# Altium PCB 矩形板V2.0.pcbdoc (part 2 of 2)
Units mm, origin at the board's own origin, x right, y up, seen from the top; angles counter-clockwise.
Board outline 153.82 x 190.84 mm, 2 copper layers (Top Layer, Bottom Layer); 141 components, 208 nets, 656 pads, 250 vias.
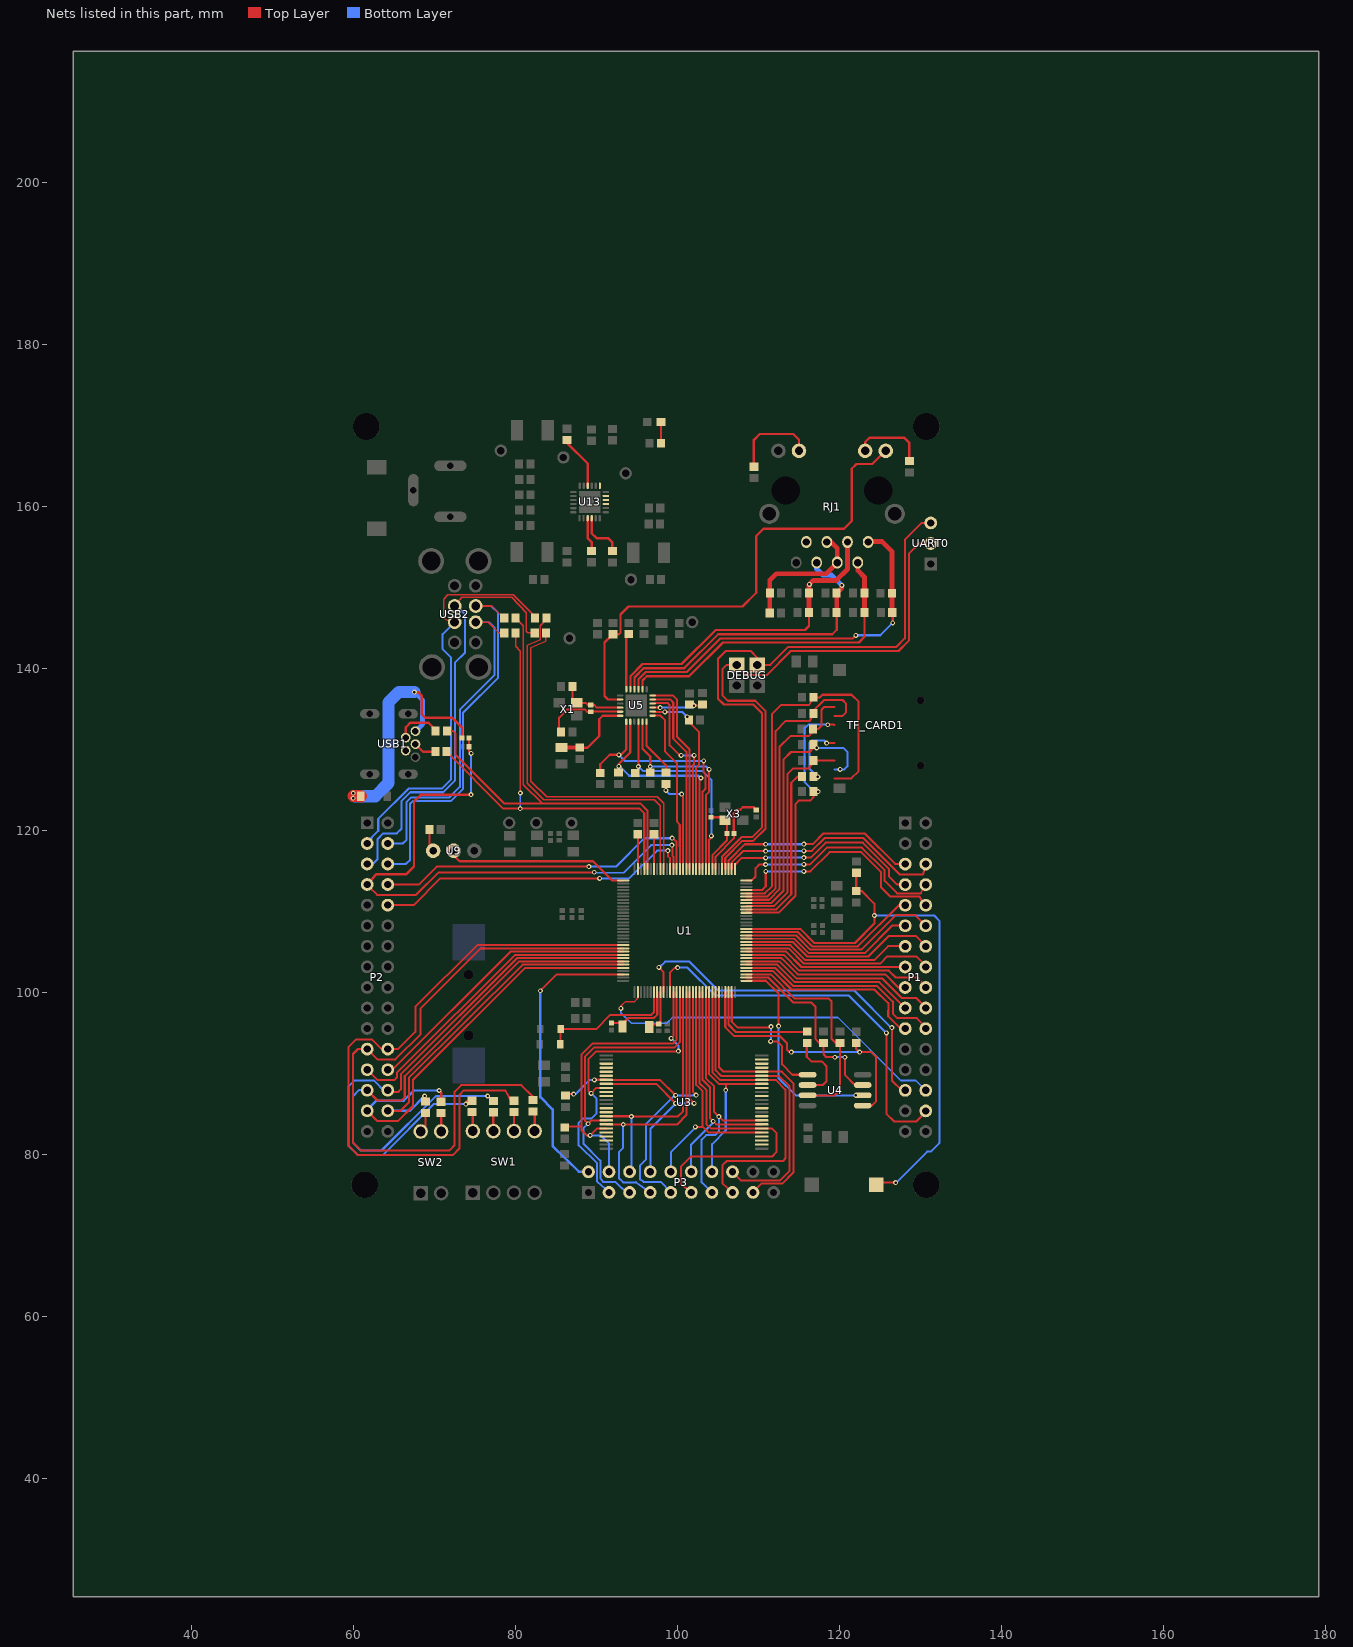
[diagram p2: the nets of this part, all layers, seen from the top]

## Via types
v1: diameter 0.61, hole 0.305, Top Layer to Bottom Layer, 250 vias

## Nets (pads, with @x,y where several pads share a name; then routed paths per layer and width w, separated by ;. In a path a pad name is that pad's centre, name@x,y a point inside that pad or via, vN(x,y) a via of type N, cw(c..) or ccw(c..) an arc to the next point about the centre after c; other vN are vias at no path point) (continued)
PB6: P3.2 U1.30 | length 36.6
  Top Layer w0.254: v1(83.08,100.23) 85.111,102.261 U1.30@93.31,102.26
  Bottom Layer w0.3: v1(83.08,100.23) 83.08,87.092 84.591,85.581 84.595,81.076 87.835,77.87 P3.2@89.02,77.87
PB7: P1.28 U1.34 | length 46.4
  Top Layer w0.2: v1(93.01,98.06) 93.011,98.319 93.58,98.89 94.7,98.89 95.111,99.302 U1.34@95.111,100.059
  Bottom Layer w0.2: v1(93.01,98.06) 93.011,97.519 94.329,96.201 98.67,96.201 99.389,96.919 119.821,96.919 127.588,89.15 129.44,89.15 130.669,87.93 P1.28@130.781,87.93
PB8: P1.27 U1.42 | length 44.5
  Top Layer w0.25: v1(97.71,103.12) 98.309,102.521 U1.42@98.309,100.06 ; v1(126.48,95.68) 126.48,89.15 127.7,87.93 P1.27@128.24,87.93
  Bottom Layer w0.25: v1@97.71,103.112 97.791,103.112 98.49,103.823 101.489,103.823 105.05,100.259 121.84,100.259 126.417,95.682 v1(126.48,95.68)
PB13: P1.10 U1.93 | length 29.3
  Top Layer w0.254: U1.93@108.51,112.661 110.451,112.661 110.91,113.12 v1(110.91,114.96) ; v1@115.63,114.979 116.43,114.979 118.792,117.341 122.721,117.341 125.134,114.913 125.139,113.033 126.298,111.87 129.902,111.87 130.483,110.79 P1.10@130.781,110.79
  Bottom Layer w0.254: v1(110.91,114.96) 110.93,114.98 v1(115.63,114.98)
PC0: P1.30 U1.44 | length 48.6
  Top Layer w0.25: U1.44@99.109,100.059 99.109,102.5 99.671,103.059 v1@100.029,103.079 ; v1(125.8,95.03) 125.8,85.05 126.77,84.08 129.483,84.08 P1.30@130.78,85.39
  Bottom Layer w0.25: v1@100.029,103.079 101.251,103.079 104.69,99.66 121.13,99.66 125.76,95.03 v1(125.8,95.03)
  other v1: 100.03,103.08
PC1: P3.3 U1.45 U3.9 | length 41.5
  Top Layer w0.25: U3.9@91.22,88.23 90.001,88.23 89.356,87.567 89.01,87.872 89.004,91.78 89.922,92.709 100.049,92.709 v1(100.11,92.77) ; v1(99.23,94.35) 99.512,94.633 U1.45@99.512,100.067
  Bottom Layer w0.25: v1@89.356,87.567 90.019,86.899 90.019,85.088 89.412,84.481 88.38,84.481 87.809,83.909 87.801,81.146 90.09,78.913 90.09,76.655 P3.3@91.56,75.33 ; v1(99.23,94.35) 100.11,93.47 v1(100.11,92.77)
  other v1: 89.356,87.567
PC2: P3.4 R29.2 U1.46 U3.19 | length 39.8
  Top Layer w0.25: R29.2@85.965,83.46 88.101,83.46 ; U3.19@91.22,83.23 90.078,83.23 v1(89.219,82.37) 88.8,82.37 88.139,83.031 88.139,92.34 89.511,93.709 99.46,93.709 99.912,94.161 U1.46@99.912,100.066
  Bottom Layer w0.25: v1(89.219,82.37) 90.499,82.37 91.56,81.311 P3.4@91.56,77.87
PC3: P3.5 U1.47 U3.17 | length 41.6
  Top Layer w0.25: U3.17@91.22,84.23 89.39,84.23 v1(88.965,83.805) 88.596,84.174 88.584,92.093 89.739,93.249 99.671,93.249 100.313,93.889 U1.47@100.313,100.066
  Bottom Layer w0.25: v1@88.965,83.805 88.429,83.287 88.429,81.301 90.481,79.249 90.481,77.085 90.865,76.597 92.361,76.599 92.442,76.528 93.13,75.84 93.984,75.329 P3.5@94.1,75.33
PC4: P3.6 U1.48 U3.16 | length 31.4
  Top Layer w0.25: U3.16@91.22,84.73 94.29,84.73 v1(94.32,84.7) ; v1@94.319,84.699 100.049,84.699 100.712,85.362 U1.48@100.712,100.066
  Bottom Layer w0.25: P3.6@94.1,77.87 94.32,78.09 v1(94.32,84.7)
PC5: P3.7 U1.49 U3.18 | length 36.9
  Top Layer w0.25: U3.18@91.22,83.73 93.29,83.73 v1(93.31,83.71) ; v1@93.311,83.709 99.963,83.709 101.129,84.905 U1.49@101.113,100.064
  Bottom Layer w0.25: v1(93.31,83.71) 93.31,80.851 92.77,80.31 92.77,77.11 93.313,76.577 94.878,76.582 P3.7@96.64,75.33
PC6: P3.8 U1.50 U3.8 | length 35.5
  Top Layer w0.25: U3.8@91.22,88.73 97.37,88.73 v1(99.769,86.331) ; U1.50@101.511,100.067 101.511,86.874 v1(102.055,86.331)
  Bottom Layer w0.25: P3.8@96.64,77.87 96.68,77.91 96.68,83.17 99.769,86.259 v1(99.769,86.331) v1(102.055,86.331)
PC7: P3.9 R28.1 U1.51 U3.7 | length 47.3
  Top Layer w0.25: R28.1@86.18,87.285 86.369,87.474 v1(87.196,87.474) ; U3.7@91.22,89.23 97.841,89.23 v1(99.769,87.303) ; U1.51@101.913,100.067 101.913,87.743 v1(102.309,87.347)
  Top Layer w0.3: v1(89.76,89.22) 89.77,89.23 U3.7@91.22,89.23
  Bottom Layer w0.25: v1(87.196,87.474) 87.45,87.474 89.196,89.22 v1(89.76,89.22) ; P3.9@99.18,75.33 97.926,76.62 95.861,76.62 95.401,76.94 95.401,78.659 96.11,79.371 96.11,83.749 99.663,87.303 v1(99.769,87.303) ; v1(99.769,87.303) 102.265,87.303 v1(102.309,87.347)
PC8: P3.10 U1.52 U3.29 | length 32.3
  Top Layer w0.25: v1(102.22,83.42) 103.12,83.42 ; U1.52@102.312,100.066 102.312,88.614 103.12,87.806 103.12,83.419 103.819,82.731 U3.29@110.42,82.73
  Bottom Layer w0.25: P3.10@99.18,77.87 99.18,80.27 102.22,83.309 v1(102.22,83.42)
PC9: P3.11 U1.53 U3.30 | length 44.5
  Top Layer w0.25: P3.11@101.72,75.33 100.43,76.361 100.43,78.52 101.657,79.749 111.677,79.749 112.221,80.29 112.221,82.67 111.66,83.229 110.42,83.229 104.128,83.229 103.58,83.752 103.58,87.981 102.714,88.837 U1.53@102.714,100.066
PC10: P3.12 U1.54 U3.31 | length 30.1
  Top Layer w0.25: U1.54@103.112,100.066 103.112,89.21 104.04,88.281 104.04,84.47 v1(104.4,84.11) 104.78,83.73 U3.31@110.42,83.73
  Bottom Layer w0.25: P3.12@101.72,77.87 101.68,77.91 101.68,81.209 104.4,83.93 v1(104.4,84.11)
PC11: P3.13 U1.55 U3.32 | length 32.9
  Top Layer w0.25: U1.55@103.514,100.066 103.509,89.447 104.53,88.428 104.53,85.26 v1(105.11,84.68) ; v1@105.109,84.679 105.617,84.23 U3.32@110.42,84.23
  Bottom Layer w0.25: P3.13@104.26,75.33 102.99,76.569 102.99,81.85 103.539,82.401 104.639,82.401 105.11,82.872 v1(105.11,84.68)
PC12: P3.14 U1.56 U3.41 | length 28.7
  Top Layer w0.25: U1.56@103.912,100.067 103.912,89.935 105.117,88.73 U3.41@110.42,88.73 ; v1(105.97,87.95) 105.981,87.961 105.981,88.73
  Bottom Layer w0.25: P3.14@104.26,77.87 104.281,81.291 105.97,82.98 v1(105.97,87.95)
PC13: P3.15 U1.57 U3.42 | length 40.3
  Top Layer w0.25: U1.57@104.313,100.067 104.313,90.168 105.251,89.23 U3.42@110.42,89.23 112.14,89.231 113.341,88.027 113.338,79.51 113.039,79.2 106.097,79.2 105.561,78.659 105.561,76.48 P3.15@106.8,75.33
PC14: P3.16 U1.58 U3.43 | length 38.1
  Top Layer w0.25: U1.58@104.712,100.067 104.712,90.405 105.387,89.73 U3.43@110.42,89.73 ; P3.16@106.8,77.87 107.9,76.78 112.66,76.78 113.859,77.979 113.859,88.41 112.541,89.729 U3.43@110.42,89.729
PC15: P3.17 U1.59 U3.44 | length 36.3
  Top Layer w0.25: U1.59@105.114,100.066 105.114,90.808 105.692,90.23 U3.44@110.42,90.23 ; P3.17@109.3,75.329 110.377,76.409 112.94,76.409 114.319,77.788 114.319,88.802 112.889,90.229 U3.44@110.42,90.229
PD8: P1.21 U1.68 | length 23.5
  Top Layer w0.254: U1.68@108.51,102.659 111.812,102.66 114.09,100.379 124.319,100.379 126.041,98.685 126.038,97.082 127.58,95.54 P1.21@128.116,95.54
PD9: P1.22 U1.69 | length 26.3
  Top Layer w0.254: U1.69@108.51,103.06 112.051,103.061 114.271,100.839 124.641,100.839 126.6,98.88 126.6,97.389 127.151,96.841 129.559,96.841 P1.22@130.781,95.55
PD10: P1.19 U1.70 | length 21.9
  Top Layer w0.254: U1.70@108.51,103.459 112.35,103.46 114.509,101.301 124.949,101.301 P1.19@128.13,98.09
PD11: P1.20 U1.71 | length 24.6
  Top Layer w0.254: U1.71@108.51,103.86 112.589,103.861 114.69,101.761 125.269,101.761 127.689,99.332 129.47,99.33 P1.20@130.781,98.09
PD12: P1.17 U1.72 | length 21.2
  Top Layer w0.254: U1.72@108.51,104.259 112.869,104.24 114.85,102.261 125.657,102.261 127.273,100.63 P1.17@128.241,100.63
PD13: P1.18 U1.73 | length 23.9
  Top Layer w0.254: U1.73@108.51,104.66 113.13,104.661 115.071,102.721 126.12,102.721 126.981,101.86 129.701,101.86 P1.18@130.669,100.63
PD14: P1.15 U1.74 | length 20.4
  Top Layer w0.254: U1.74@108.51,105.059 113.43,105.06 115.33,103.16 P1.15@128.13,103.17
PD15: P1.16 U1.75 | length 24
  Top Layer w0.254: U1.75@108.51,105.46 113.75,105.459 115.63,103.579 125.04,103.579 125.932,104.471 129.493,104.471 P1.16@130.781,103.17
PE10: P2.8 U1.115 | length 41.6
  Top Layer w0.254: P2.8@64.23,113.34 68.05,113.34 70.26,115.55 v1@89.071,115.55 ; v1(99.35,119.08) v1(99.35,119.08) 99.91,118.62 U1.115@99.909,115.259
  Bottom Layer w0.254: v1(89.07,115.56) 92.416,115.56 95.896,119.061 v1@99.351,119.061
PE11: P2.7 R68.1 R69.2 U1.116 | length 73.1
  Top Layer w0.24: P2.7@61.69,113.34 61.84,113.13 62.909,112.06 67.72,112.06 70.509,114.849 v1@89.729,114.849 ; R69.2@74.244,130.35 74.244,129.826 v1(74.52,129.55)
  Top Layer w0.254: R69.2@74.244,130.35 74.254,130.36 R68.1@74.254,131.43 ; v1(99.31,118.22) 99.371,118.22 99.371,116.909 99.511,116.757 U1.116@99.51,115.259
  Top Layer w0.3: P2.7@61.69,113.34 62.838,114.631 66.547,114.631 67.471,115.571 67.471,123.589 68.322,124.44 v1(74.51,124.44)
  Bottom Layer w0.24: v1(89.73,114.86) 89.79,114.8 93.35,114.8 96.51,117.96 96.75,118.22 v1(99.31,118.22)
  Bottom Layer w0.3: v1(74.51,124.44) 74.51,129.54 v1(74.52,129.55)
PE12: P2.10 U1.117 | length 39.8
  Top Layer w0.254: P2.10@64.23,110.8 67.42,110.8 70.72,114.1 v1@90.39,114.1 ; v1@98.83,117.539 98.83,116.861 99.109,116.582 U1.117@99.109,115.259
  Bottom Layer w0.254: v1@90.39,114.1 94.034,114.1 97.494,117.539 v1@98.83,117.539
  other v1: 90.39,114.1 98.83,117.54
PF7: P1.8 U1.96 | length 28.2
  Top Layer w0.254: U1.96@108.51,113.86 109.17,113.861 109.65,114.339 109.65,115.36 110.11,115.82 v1(110.89,115.82) ; v1@115.609,115.84 116.389,115.84 118.459,117.91 122.78,117.91 125.591,115.098 125.589,113.8 127.141,112.251 130.049,112.251 130.542,113.33 P1.8@130.669,113.33
  Bottom Layer w0.254: v1(110.89,115.82) 115.59,115.82 v1(115.61,115.84)
PF8: P1.7 U1.97 | length 25.4
  Top Layer w0.254: U1.97@107.11,115.259 107.11,115.799 107.949,116.64 v1(110.89,116.64) ; v1@115.609,116.66 116.45,116.66 118.299,118.509 122.899,118.509 126.12,115.278 126.12,114.359 127.156,113.323 P1.7@128.139,113.33
  Bottom Layer w0.254: v1(110.89,116.64) 110.91,116.66 v1(115.61,116.66)
PF9: P1.6 U1.98 | length 28.9
  Top Layer w0.254: U1.98@106.709,115.259 106.709,116.079 108.111,117.481 v1(110.89,117.48) ; v1@115.609,117.501 116.59,117.501 118.18,119.091 122.945,119.091 127.461,114.58 130.334,114.58 P1.6@130.722,115.908
  Bottom Layer w0.254: v1(110.89,117.48) 115.59,117.48 v1(115.61,117.5)
PF10: P1.5 U1.99 | length 25.8
  Top Layer w0.254: U1.99@106.31,115.259 106.31,116.3 108.33,118.319 v1@110.89,118.319 ; v1@115.609,118.339 116.709,118.339 118.04,119.67 123.11,119.67 126.879,115.901 P1.5@128.129,115.901
  Bottom Layer w0.254: v1(110.89,118.32) 115.59,118.32 v1(115.61,118.34)
PG0: P2.29 R18.1 U1.28 | length 53.7
  Top Layer w0.254: P2.29@61.69,85.4 62.96,84.13 65.48,84.13 67.349,86 67.349,89.221 81.205,103.061 U1.28@93.31,103.06
  Top Layer w0.3: v1(70.57,87.91) 70.82,87.66 R18.1@70.82,86.52
  Bottom Layer w0.3: P2.29@61.36,85.19 62.841,86.67 66.201,86.67 67.453,87.923 v1(70.57,87.91)
PG1: P2.30 R19.1 U1.27 | length 44.4
  Top Layer w0.254: P2.30@64.23,85.4 65.8,85.4 66.831,86.429 66.831,89.462 80.882,103.46 U1.27@93.31,103.459
  Top Layer w0.3: v1(68.78,87.23) 68.78,86.64 R19.1@68.89,86.53
  Bottom Layer w0.3: P2.30@64.23,85.4 66.95,85.4 v1(68.78,87.23)
PG3: P2.27 R61.1 U1.26 | length 69.4
  Top Layer w0.254: P2.27@61.69,87.94 62.96,86.67 65.899,86.67 66.331,87.097 66.328,89.688 80.484,103.861 U1.26@93.31,103.86 ; v1(76.57,87.23) 77.17,86.63 R61.1@77.27,86.63
  Bottom Layer w0.25: P2.27@61.69,87.951 60.669,87.951 59.94,87.219 59.94,81.443 60.908,80.501 63.46,80.501 70.169,87.209 v1@76.569,87.209
PG5: P2.28 R60.1 U1.25 | length 68.8
  Top Layer w0.254: P2.28@63.9,87.73 65.531,87.73 65.861,88.06 65.861,89.899 80.194,104.26 U1.25@93.31,104.259 ; v1(73.88,86.24) 73.88,86.46 74.07,86.65 R60.1@74.66,86.65
  Bottom Layer w0.25: P2.28@63.9,87.73 63.941,87.73 62.5,89.17 60.138,89.17 59.371,88.398 59.371,81.093 60.504,79.97 63.661,79.97 69.93,86.239 v1@73.88,86.239
PG6: P2.25 U1.24 | length 38.9
  Top Layer w0.254: P2.25@61.69,90.48 62.98,89.19 65.023,89.19 65.401,89.574 65.401,90.143 79.988,104.661 U1.24@93.31,104.66
PG7: P2.26 U1.23 | length 35.1
  Top Layer w0.254: P2.26@64.23,90.48 64.809,90.48 79.391,105.06 U1.23@93.31,105.059
PG8: P2.23 R62.1 U1.22 | length 83.5
  Top Layer w0.254: P2.23@61.69,93.02 62.95,91.761 65.17,91.761 68.289,94.877 68.289,98.062 75.726,105.461 U1.22@93.31,105.46 ; P2.23@61.69,93.041 60.56,93.041 59.94,92.418 59.94,81.469 60.951,80.483 71.809,80.491 72.49,81.179 72.495,87.765 73.311,88.581 80.72,88.581 82.17,87.13 R62.1@82.17,86.729
PG9: P2.24 R63.1 U1.21 | length 83.2
  Top Layer w0.25: P2.24@64.23,93.01 63.499,93.01 62.279,94.23 60.324,94.23 59.399,93.31 59.399,81.07 60.522,79.95 72.3,79.95 73.087,80.762 73.097,87.397 73.631,87.93 78.741,87.93 79.46,86.65 R63.1@79.83,86.65
  Top Layer w0.254: P2.24@64.23,93.02 65.487,93.02 67.644,95.164 67.636,98.23 75.299,105.86 U1.21@93.57,105.86
PG11: P1.13 U1.76 | length 21.1
  Top Layer w0.254: U1.76@108.51,105.859 113.951,105.86 115.79,104.019 124.294,104.019 126.015,105.74 P1.13@128.13,105.74
PG12: P1.14 U1.77 | length 24.5
  Top Layer w0.254: U1.77@108.51,106.26 114.21,106.261 116.011,104.461 123.59,104.461 126.13,107.001 129.409,107.001 P1.14@130.669,105.741
PG13: P1.11 U1.78 | length 21.8
  Top Layer w0.254: U1.78@108.51,106.659 114.451,106.64 116.209,104.88 123.14,104.88 126.539,108.281 P1.11@128.129,108.281
PG14: P1.12 U1.79 | length 25.2
  Top Layer w0.254: U1.79@108.51,107.06 114.649,107.059 116.409,105.299 122.681,105.299 126.963,109.561 129.389,109.561 P1.12@130.669,108.281
PG15: P1.9 U1.80 | length 22.5
  Top Layer w0.254: U1.80@108.51,107.459 114.89,107.46 116.628,105.7 122.279,105.7 127.4,110.821 P1.9@128.129,110.821
R9_2: LED4.1 R9.2 | length 2.6
  Top Layer w0.28: R9.2@97.966,167.842 97.966,170.431 LED4.1@97.977,170.442
R11_2: R11.2 U13.10 | length 6
  Top Layer w0.3: U13.10@89.414,158.59 89.414,156.724 90.016,156.122 91.436,156.122 91.967,155.594 R11.2@91.967,154.522
R60_2: R60.2 SW1.8 | length 2.4
  Top Layer w0.3: R60.2@74.66,85.25 74.74,85.17 SW1.8@74.74,82.9
R61_2: R61.2 SW1.7 | length 2.3
  Top Layer w0.3: R61.2@77.27,85.23 77.27,82.91 SW1.7@77.28,82.9
R62_2: R62.2 SW1.5 | length 2.5
  Top Layer w0.3: R62.2@82.17,85.33 82.36,85.14 SW1.5@82.36,82.9
R63_2: R63.2 SW1.6 | length 2.4
  Top Layer w0.3: SW1.6@79.82,82.9 79.82,85.24 R63.2@79.83,85.25
R73_2: R73.2 U13.9 | length 4.3
  Top Layer w0.3: U13.9@88.916,158.59 88.916,156.122 89.406,155.632 R73.2@89.406,154.542
R74_1: R74.1 U13.22 | length 6.7
  Top Layer w0.28: R74.1@86.376,168.232 86.376,167.882 88.931,165.327 U13.22@88.931,162.59
RESET: C50.2 R64.1 SW3.2 U1.81 | length 70.8
  Top Layer w0.254: U1.81@108.51,107.86 115.16,107.862 116.889,106.129 121.931,106.129 124.33,108.528 v1(124.33,109.52) 124.33,110.99 122.772,112.548 R64.1@122.086,112.549 ; SW3.2@124.58,76.27 124.85,76.54 v1(126.94,76.54)
  Top Layer w0.3: R64.1@122.086,112.549 122.086,114.749 C50.2@122.136,114.799
  Bottom Layer w0.25: v1(124.33,109.52) 126.57,109.52 131.71,109.52 132.36,108.87 132.36,81.41 132.33,81.41 131.29,80.37 130.84,80.37 127.01,76.54 v1(126.94,76.54)
RJ1_4: C42.1 R17.1 RJ1.4 RJ1.5 | length 16.6
  Top Layer w0.6: C42.1@111.411,149.327 111.411,150.938 112.206,151.73 118.365,151.73 RJ1.4@119.734,153.104 ; R17.1@111.412,146.914 C42.1@111.412,149.327 ; RJ1.5@118.464,155.685 118.937,155.68 119.732,154.89 RJ1.4@119.734,153.145
RJ1_7: RJ1.7
RJ1_10: R46.2 RJ1.10 | length 9.2
  Top Layer w0.3: RJ1.10@123.185,166.935 123.181,167.961 123.75,168.53 127.989,168.53 128.639,167.879 R46.2@128.639,165.629
RJ1_11: R47.2 RJ1.11 | length 10.8
  Top Layer w0.3: R47.2@109.44,164.941 109.44,168.25 110.169,168.979 114.309,168.979 115.012,168.276 RJ1.11@115.015,166.934
RMIIOREFCLK: C23.2 U1.109 U5.14 | length 23.4
  Top Layer w0.254: U5.14@97.075,134.679 97.094,134.66 v1(98.45,134.66) ; C23.2@101.185,133.437 101.413,133.437 102.65,132.2 102.65,128.1 102.31,127.76 U1.109@102.309,115.259
  Bottom Layer w0.254: v1(98.45,134.66) 100.57,134.66 v1(101.19,134.04)
RMIOCRSDV: R36.2 U1.106 U5.11 | length 26.7
  Top Layer w0.254: U1.106@103.511,115.259 103.51,124.38 103.91,124.78 v1(103.91,127.56)
  Top Layer w0.28: U5.11@95.685,133.549 95.685,130.125 96.651,129.16 v1(96.651,127.92) R36.2@96.65,127.16
  Bottom Layer w0.254: v1(96.651,127.92) 103.55,127.92 v1(103.91,127.56)
RMIOMDC: U1.114 U5.13 | length 21
  Top Layer w0.254: U5.13@96.836,134.199 97.91,134.199 98.49,133.62 98.49,129.759 99.927,128.321 99.927,121.146 100.29,120.699 U1.114@100.31,115.259
RMIOMDIO: R43.1 U1.113 | length 12.3
  Top Layer w0.254: v1(98.57,124.96) R43.1@98.57,125.76 ; v1(100.53,124.5) 100.709,124.32 U1.113@100.709,115.259
  Bottom Layer w0.254: v1(98.57,124.96) 98.57,124.94 98.99,124.52 100.51,124.52 v1(100.53,124.5)
RMIORXD0: R34.2 U1.108 U5.8 | length 29
  Top Layer w0.254: U1.108@102.711,115.259 102.711,126.284 v1@102.889,126.5
  Top Layer w0.28: R34.2@92.729,127.161 92.77,127.199 v1(92.77,127.94) 92.77,128.227 94.182,129.637 U5.8@94.187,133.549
  Bottom Layer w0.254: v1(92.77,127.94) 92.871,127.94 94.029,126.78 102.609,126.78 v1@102.889,126.5
  other v1: 102.89,126.5
RMIORXD1: R35.2 U1.107 U5.7 | length 32.9
  Top Layer w0.254: U1.107@103.11,115.259 103.11,124.819 103.471,125.182 103.471,126.965 103.25,127.216 v1@103.25,128.621
  Top Layer w0.28: R35.2@90.47,127.14 90.47,127.96 90.47,128.212 91.641,129.384 93.038,129.384 93.673,130.019 93.686,130.031 U5.7@93.686,133.549
  Bottom Layer w0.254: v1@92.77,129.36 93.529,128.601 v1@103.25,128.621
  other v1: 103.25,128.62 92.77,129.36
RMIORXER: R37.2 U1.105 U5.10 | length 27.4
  Top Layer w0.254: U1.105@103.91,115.259 103.91,118.88 104.189,119.16 v1@104.189,119.36
  Top Layer w0.28: R37.2@94.79,127.14 95.186,127.536 v1(95.186,127.92) U5.10@95.186,133.549
  Bottom Layer w0.254: v1@95.185,127.92 95.769,127.341 103.11,127.341 104.189,126.261 v1@104.189,119.36
  other v1: 104.19,119.36
RMIOTXD0: U1.112 U5.17 | length 23.9
  Top Layer w0.254: U5.17@96.93,136.201 99.108,136.201 99.49,135.819 99.49,131.359 101.111,129.739 U1.112@101.111,115.259
RMIOTXD1: U1.111 U5.18 | length 24.8
  Top Layer w0.254: U5.18@96.93,136.702 99.428,136.702 99.97,136.16 99.97,131.56 101.51,130.021 U1.111@101.509,115.259
RMIOTXEN: U1.110 U5.16 | length 24.9
  Top Layer w0.254: U5.16@96.836,135.698 97.33,135.74 98.83,135.74 99.051,135.52 99.051,130.539 100.29,129.299 v1(100.45,129.3) ; U1.110@101.911,115.259 101.911,128.067 102.07,128.226 v1(102.07,129.3)
  Bottom Layer w0.254: v1(100.45,129.3) v1(102.07,129.3)
RTCVD: D4.2 D5.2 U1.39 | length 16.8
  Top Layer w0.25: D5.2@85.54,93.62 85.54,95.44 D4.2@85.6,95.5 ; D4.2@85.599,95.5 89.97,95.5 91.731,97.26 96.788,97.26 97.113,97.582 U1.39@97.113,100.066
RXD0: DEBUG.c U1.100 UART0.2 | length 71.2
  Top Layer w0.254: U1.100@105.911,115.258 105.911,116.622 108.02,118.73 109.361,118.73 110.9,120.27 110.9,134.76 109.62,136.04 106.239,136.04 105.561,136.719 105.561,139.939 106.089,140.47 DEBUG.c@107.33,140.47 107.359,140.47 108.629,139.2 111.035,139.2 113.989,142.18 127.301,142.18 128.578,143.457 128.586,154.217 129.831,155.459 UART0.2@131.278,155.459
RXN: C38.1 R40.1 RJ1.6 U5.22 | length 39.4
  Top Layer w0.28: U5.22@94.701,137.46 94.702,138.921 95.851,140.069 100.839,140.069 105.03,144.26 119.119,144.26 119.671,144.811 R40.1@119.67,146.914
  Top Layer w0.6: R40.1@119.67,146.914 C38.1@119.67,149.327 120.3,149.957 v1(120.3,150.28)
  Bottom Layer w0.6: RJ1.6@117.195,153.145 117.195,152.312 117.941,151.566 119.014,151.566 v1(120.3,150.28)
RXP: C37.1 R38.1 RJ1.3 U5.23 | length 40.3
  Top Layer w0.28: U5.23@94.2,137.46 94.2,139.071 95.701,140.569 100.519,140.569 104.72,144.77 115.749,144.77 116.242,145.261 R38.1@116.241,146.914
  Top Layer w0.6: R38.1@116.241,146.914 C37.1@116.241,149.327 116.241,150.366 v1(116.291,150.416) ; v1@116.29,150.417 116.785,150.91 119.63,150.91 121.004,152.284 RJ1.3@121.004,155.685
S$19: 
S$28: 
S$30: 
S$42: 
S$44: 
S$47: 
S$48: 
S$49: 
S$50: 
S$53: 
S$54: 
S$55: 
S$57: 
S$61: 
S$67: 
S$69: 
S$71: 
S$73: 
S$77: 
S$79: 
S$81: 
S$2331: 
SD_CD: R24.1 TF_CARD1.9 U1.92 | length 48.9
  Top Layer w0.25: U1.92@108.512,112.266 110.804,112.266 111.69,113.153 111.69,134.422 112.813,135.54 116.272,135.54 R24.1@116.79,136.47 117.611,136.47 117.921,136.78 121.499,136.78 122.391,135.891 122.391,127.349 121.489,126.449 119.389,126.449
SD_CLK: R15.1 U1.87 | length 21.8
  Top Layer w0.25: U1.87@108.512,110.267 112.206,110.267 114.06,112.121 114.06,125.907 114.842,126.69 R15.1@115.39,126.69
SD_CLK-P: R15.2 TF_CARD1.5 | length 8
  Top Layer w0.25: v1(118.43,130.81) 119.35,130.81 119.39,130.85
  Bottom Layer w0.25: v1@117.359,126.65 117.319,126.65 116.31,127.661 116.31,130.859 116.579,131.131 118.111,131.131 v1@118.429,130.811
  other v1: 117.36,126.65
SD_CMD: R72.1 TF_CARD1.3 U1.86 | length 34.2
  Top Layer w0.25: U1.86@108.512,109.866 112.505,109.866 114.583,111.943 114.591,123.31 114.979,123.701 116.389,123.699 116.79,124.1 R72.1@116.79,124.829 ; v1(118.57,133.08) 119.36,133.08 119.39,133.05
  Bottom Layer w0.25: v1(117.37,124.82) 116.9,124.82 115.69,126.03 115.69,132.61 116.16,133.08 v1(118.57,133.08)
SD_D0: R71.1 TF_CARD1.7 U1.88 | length 27.2
  Top Layer w0.25: U1.88@108.512,110.666 111.903,110.666 113.57,112.332 113.57,126.978 114.281,127.691 116.254,127.689 116.889,128.649 R71.1@116.79,128.649 ; R71.1@116.79,128.65 119.39,128.65
SD_D1: R70.1 TF_CARD1.8 U1.89 | length 34.3
  Top Layer w0.25: U1.89@108.512,111.067 111.606,111.067 113.079,112.543 113.079,128.771 114.029,129.716 116.31,129.711 116.79,130.201 R70.1@116.79,130.63 v1(117.2,130.22)
  Bottom Layer w0.25: v1@117.199,130.219 120.491,130.219 120.986,129.723 120.994,127.935 120.618,127.559 v1(120.09,127.56) ; 119.389,127.549 119.389,127.56 v1(120.09,127.56)
SD_D2: R26.1 TF_CARD1.1 U1.90 | length 32.9
  Top Layer w0.25: U1.90@108.512,111.466 111.317,111.466 112.599,112.749 112.599,130.328 113.94,131.669 116.219,131.669 117.121,132.571 116.75,132.571 117.42,132.571 117.799,132.949 117.799,134.941 118.101,135.24 119.389,135.24
SD_D3: R25.1 TF_CARD1.2 U1.91 | length 37.6
  Top Layer w0.25: U1.91@108.512,111.867 111.083,111.867 112.119,112.906 112.119,132.299 113.331,133.511 116.305,133.511 116.867,134.489 116.79,134.489 116.468,134.489 118.109,136.129 120.387,136.129 120.811,135.715 120.811,134.58 120.379,134.151 119.389,134.151
SPEED_LED: R48.2 RJ1.9 U5.2 | length 62.4
  Top Layer w0.28: R48.2@92.035,144.251 91.006,143.222 91.006,142.846 91.006,136.623 91.437,136.191 U5.2@92.93,136.191 ; R48.2@92.035,144.251 92.772,144.252 92.97,144.45 92.97,146.681 93.968,147.679 108.04,147.679 109.739,149.378 109.739,156.383 110.631,157.29 120.57,157.29 121.53,158.25 121.53,164.679 122.119,165.271 124.047,165.271 RJ1.9@125.726,166.934
SPI_CLK: R16.2 U1.62 | length 14
  Top Layer w0.254: U1.62@106.31,100.06 106.31,96.06 107.23,95.14 R16.2@115.97,95.14
SPI_CS: R30.1 U1.61 U4.1 | length 33.6
  Top Layer w0.254: U1.61@105.911,100.06 105.911,95.738 107.029,94.621 112.67,94.621 113.529,93.76 113.529,92.919 113.801,92.65 v1(114.07,92.65) ; R30.1@122.089,93.76 122.089,93.041 v1(122.49,92.64) ; v1(122.49,92.64) 123.945,92.639 124.499,92.081 124.499,86.541 124.004,86.046 U4.1@122.879,86.046
  Bottom Layer w0.254: v1(114.07,92.65) 114.08,92.64 v1(122.49,92.64)
SPI_D3: R31.1 U1.67 U4.7 | length 27.9
  Top Layer w0.254: U1.67@108.51,102.26 111.51,102.261 114.509,99.259 118.69,99.259 119.031,98.921 119.031,94.28 119.531,93.78 120.069,93.78 120.07,87.98 119.405,87.315 U4.7@116.08,87.315
SPI_DI: U1.65 U4.2 | length 26.4
  Top Layer w0.254: U1.65@108.51,101.46 110.931,101.461 112.49,99.902 v1(112.49,95.85) ; v1(122.04,87.3) 122.865,87.3 U4.2@122.88,87.315
  Bottom Layer w0.254: v1(112.49,95.85) 112.49,89.439 114.629,87.3 v1(122.04,87.3)
SPI_DO: U1.63 U4.5 | length 18.4
  Top Layer w0.254: U1.63@106.709,100.06 106.709,96.421 107.46,95.67 111.56,95.67 v1(111.56,95.81) ; v1(111.51,93.97) 112.32,93.97 112.93,93.36 112.93,91.13 114.205,89.855 U4.5@116.08,89.855
  Bottom Layer w0.254: v1(111.51,93.97) 111.56,94.02 v1(111.56,95.81)
SPI_WP: R32.1 U1.66 U4.3 | length 24.3
  Top Layer w0.254: U1.66@108.51,101.861 111.228,101.862 114.309,98.779 116.529,98.779 117.029,98.281 117.029,94.28 117.529,93.78 R32.1@118.03,93.78 118.05,92.46 118.35,92.02 v1@119.45,92.02 ; v1(120.67,92.02) 120.67,89.84 121.925,88.585 U4.3@122.88,88.585
  Bottom Layer w0.254: v1@119.45,92.02 v1(120.67,92.02)
  other v1: 119.45,92.02
SW2_3: R18.2 SW2.3 | length 2.3
  Top Layer w0.3: R18.2@70.82,85.12 70.82,82.86 SW2.3@70.83,82.85
SW2_4: R19.2 SW2.4 | length 2.5
  Top Layer w0.3: SW2.4@68.29,82.85 68.89,83.45 R19.2@68.89,85.13
TXD0: DEBUG.a U1.101 UART0.3 | length 75.4
  Top Layer w0.254: U1.101@105.51,115.258 105.51,116.78 107.921,119.19 109.231,119.19 110.461,120.419 110.461,134.468 109.361,135.571 105.749,135.571 105.01,136.31 105.01,141.209 106,142.2 109.03,142.2 109.871,141.329 DEBUG.a@109.87,140.47 111.469,140.47 113.699,142.7 127.052,142.7 128.088,143.737 128.098,155.929 130.171,157.999 UART0.3@131.278,157.999
TXN: C36.1 R42.1 RJ1.2 U5.20 | length 40.3
  Top Layer w0.28: U5.20@95.7,137.46 95.701,138.54 96.209,139.05 101.436,139.05 105.635,143.239 122.419,143.239 123.1,143.958 R42.1@123.099,146.914
  Top Layer w0.6: RJ1.2@122.275,153.145 122.274,152.144 123.092,151.326 C36.1@123.099,149.327 ; R42.1@123.099,146.914 C36.1@123.099,149.327
TXP: C35.1 R41.1 RJ1.1 U5.21 | length 47.8
  Top Layer w0.28: U5.21@95.198,137.46 95.198,138.7 96.079,139.579 101.169,139.579 105.299,143.729 121.659,143.729 v1(122.051,144.12)
  Top Layer w0.3: R41.1@126.528,146.914 126.591,146.851 v1(126.591,145.666)
  Top Layer w0.6: RJ1.1@123.544,155.685 125.284,155.685 126.491,154.478 C35.1@126.491,149.314 ; C35.1@126.491,149.316 126.491,146.951 R41.1@126.528,146.914
  Bottom Layer w0.28: v1(122.051,144.12) 125.045,144.12 v1(126.591,145.666)
U3_3: U3.3
U3_4: U3.4
U3_5: U3.5
U3_6: U3.6
U3_10: U3.10
U3_11: U3.11
U3_14: U3.14
U3_15: U3.15
U3_20: U3.20
U3_21: U3.21
U3_22: U3.22
U3_26: U3.26
U3_27: U3.27
U3_28: U3.28
U3_33: U3.33
U3_35: U3.35
U3_38: U3.38
U3_40: U3.40
U3_45: U3.45
U3_46: U3.46
U3_47: U3.47
U4_6: R16.1 U4.6 | length 9
  Top Layer w0.254: R16.1@115.97,93.739 115.97,92.071 116.541,91.499 117.811,91.499 118.41,90.9 118.41,89.07 117.925,88.585 U4.6@116.08,88.585
U5_6: C33.1 C34.1 U5.6 | length 10.1
  Top Layer w0.28: C34.1@87.936,130.249 88.885,130.25 90.335,131.698 90.335,133.75 90.778,134.192 U5.6@92.93,134.192
  Top Layer w0.5: C33.1@85.686,130.265 87.92,130.265 C34.1@87.936,130.249
U5_12: R43.2 U5.12 | length 7.4
  Top Layer w0.254: U5.12@96.186,133.549 96.186,130.484 97.51,129.16 98.39,128.28 98.57,128.1 R43.2@98.57,127.16
U5_15: C43.2 R14.1 U5.15 | length 7.3
  Top Layer w0.254: U5.15@96.836,135.198 96.837,135.2 v1(97.87,135.2)
  Top Layer w0.28: R14.1@101.136,135.449 v1(102.05,135.449) 102.948,135.449 C43.2@103.086,135.31
  Bottom Layer w0.254: v1(97.87,135.2) 101.801,135.2 v1(102.05,135.449)
U5_24: R49.2 U5.24 | length 7
  Top Layer w0.28: U5.24@93.686,137.349 93.686,143.945 93.99,144.248 R49.2@93.99,144.26
U9_3: R20.1 U9.3 | length 2.8
  Top Layer w0.254: R20.1@69.38,120.16 69.38,117.98 U9.3@69.84,117.52
U13_15: U13.15
U13_16: U13.16
U13_17: U13.17
U13_19: U13.19
USB0_DM: R12.2 R53.2 U1.124 | length 63.6
  Top Layer w0.18: R53.2@80.02,146.26 80.989,145.29 80.989,125.695 83.331,123.361 81.555,123.361
  Top Layer w0.254: R12.2@71.55,132.279 72.31,132.279 72.61,131.979 72.61,129.34 78.589,123.361 95.429,123.361 96.31,122.479 U1.124@96.31,115.259
USB0_DM_E: P2.6 R53.1 USB2.2 | length 48
  Top Layer w0.2: USB2.2@75.094,147.74 77.039,147.74 78.52,146.259 R53.1@78.619,146.259
  Bottom Layer w0.25: P2.6@64.23,115.88 66.468,115.88 66.971,116.333 66.971,123.29 67.359,123.681 72.071,123.681 73.549,125.159 73.549,134.59 77.86,138.9 77.86,146.889 77.009,147.74 USB2.2@75.094,147.74
USB0_DP: R13.2 R54.2 U1.125 | length 57.2
  Top Layer w0.18: R54.2@80.02,144.4 80.02,142.767 80.611,142.177 v1@80.611,124.649
  Top Layer w0.25: v1(80.59,122.72) 81.262,122.72
  Top Layer w0.254: R13.2@71.436,129.749 71.436,129.795 78.51,122.721 95.33,122.721 95.909,122.139 U1.125@95.909,115.259
  Bottom Layer w0.18: v1(80.59,122.72) 80.59,124.63 v1(80.61,124.65)
USB0_DP_E: P2.4 R54.1 USB2.3 | length 42.6
  Top Layer w0.2: USB2.3@75.094,145.748 76.63,145.748 77.979,144.4 R54.1@78.619,144.4
  Bottom Layer w0.25: P2.4@64.23,118.42 66.112,118.42 66.569,118.87 66.569,123.559 67.09,124.08 71.799,124.08 73.13,125.411 73.13,134.951 77.42,139.241 77.42,145.05 76.74,145.731 USB2.3@75.094,145.751
USB0_ID: U1.1 U9.2 | length 22.8
  Top Layer w0.26: U9.2@72.38,117.52 72.38,116.931 73.09,116.221 89.569,116.221 91.929,113.861 U1.1@93.31,113.86
USB0_REXT: R51.2 U1.127 | length 4.3
  Top Layer w0.254: R51.2@95.109,119.554 U1.127@95.111,115.259
USB1_1: D6.1 R68.2 USB1.1 | length 35.4
  Top Layer w0.3: v1@67.519,137.11 67.987,137.11 68.421,136.681 68.421,134.42 68.909,133.93 72.211,133.93 73.405,132.733 R68.2@73.405,131.43
  Top Layer w1.5: v1@60.019,124.26 D6.1@60.904,124.24
  Bottom Layer w0.6: v1@67.519,137.11 68.54,136.091 68.54,133.135 USB1.1@67.657,132.279
  Bottom Layer w1.5: v1@60.131,124.24 62.681,124.24 64.324,125.883 64.309,135.819 65.599,137.11 v1@67.519,137.11
  other v1: 59.96,124 59.97,124.63 67.52,137.11
USB1_2: R12.1 USB1.2 | length 5.9
  Top Layer w0.3: USB1.2@66.455,131.486 66.455,132.756 67.049,133.348 69.236,133.348 70.136,132.449 R12.1@70.136,132.098
USB1_3: R13.1 USB1.3 | length 2.8
  Top Layer w0.3: USB1.3@67.651,130.679 68.591,129.749 R13.1@70.037,129.749
USB1_4: USB1.4
USB1_DM: R58.2 U1.119 | length 45.2
  Top Layer w0.18: R58.2@83.78,144.42 83.773,143.379 81.881,142.573 81.881,126.124 83.839,124.194 97.509,124.194 98.309,123.381 U1.119@98.309,115.259
USB1_DM_E: P2.5 R58.1 USB2.6 | length 55.4
  Top Layer w0.18: USB2.6@72.493,147.74 72.571,147.741 73.385,148.84 79.52,148.84 81.35,146.935 81.35,144.608 81.538,144.42 R58.1@82.38,144.42
  Bottom Layer w0.25: P2.5@61.36,115.67 62.16,115.67 62.97,116.48 62.97,118.949 63.679,119.66 65.36,119.66 65.906,120.206 65.914,123.633 67.019,124.74 71.068,124.74 72.51,126.178 72.51,140.729 73.77,141.989 73.77,146.726 72.798,147.74 USB2.6@72.493,147.74
USB1_DP: R59.2 U1.120 | length 47.2
  Top Layer w0.18: R59.2@83.829,146.259 83.829,146.03 83.079,145.281 83.079,143.592 81.449,142.906 81.449,125.87 83.499,123.821 97.151,123.821 97.91,123.059 U1.120@97.91,115.259
USB1_DP_E: P2.3 R59.1 USB2.7 | length 51.8
  Top Layer w0.18: USB2.7@72.493,145.739 71.994,145.739 71.121,146.235 71.121,148.581 71.67,149.13 79.72,149.13 82.43,146.42 R59.1@82.43,146.26
  Bottom Layer w0.25: P2.3@61.69,118.42 61.842,118.42 62.279,119.19 63.059,119.967 63.059,121.461 66.79,125.19 70.877,125.19 72.061,126.368 72.061,141.359 71.009,142.408 71.009,144.26 USB2.7@72.493,145.738
USB1_REXT: R52.2 U1.122 | length 4.3
  Top Layer w0.254: U1.122@97.11,115.259 R52.2@97.11,119.554
X2_IN: C47.2 U1.40 X2.1 | length 10.7
  Top Layer w0.25: C47.2@91.87,96.224 93.483,96.223 93.064,95.804 93.222,95.804 92.904,95.804 93.961,96.861 97.1,96.861 97.512,97.272 U1.40@97.512,100.066
X2_OUT: C48.2 U1.41 X2.2 | length 5.5
  Top Layer w0.25: X2.2@96.518,95.756 96.519,96.089 97.489,96.089 97.913,96.513 U1.41@97.913,100.066
X_IN: C49.2 R55.1 U1.103 X3.1 | length 11
  Top Layer w0.254: U1.103@104.713,115.266 104.713,116.782 106.971,119.038 R55.1@106.969,119.638
  Top Layer w0.28: R55.1@106.968,119.637 106.968,122.139 107.41,122.578 107.771,122.578 X3.1@108.07,122.88 ; X3.1@108.07,122.88 109.414,122.88 C49.2@109.75,122.544
X_OUT: C46.2 R55.2 U1.104 X3.3 | length 8.7
  Top Layer w0.254: U1.104@104.313,115.266 104.313,116.976 106.136,118.849 R55.2@106.121,119.638
  Top Layer w0.28: C46.2@104.15,121.656 105.494,121.656 X3.3@105.87,121.28 106.121,121.029 R55.2@106.121,119.638
XTAL1: C41.2 R50.1 U5.5 X1.1 | length 9.8
  Top Layer w0.24: 85.386,133.947 86.417,134.979 88.556,134.979 88.86,134.674 R50.1@89.285,134.674
  Top Layer w0.25: R50.1@89.286,134.674 89.286,134.693 U5.5@92.93,134.693
  Top Layer w0.28: 85.386,133.949 85.386,132.56 C41.2@85.598,132.348
XTAL2: C40.1 R50.2 U5.4 X1.3 | length 7.8
  Top Layer w0.24: X1.3@87.59,135.78 88.655,135.78 88.912,135.523 R50.2@89.286,135.523
  Top Layer w0.25: R50.2@89.286,135.523 89.712,135.523 90.041,135.193 U5.4@92.93,135.193
  Top Layer w0.28: C40.1@87.05,137.78 87.05,136.32 X1.3@87.59,135.78
pads on no net: B1.0 RJ1.15 RJ1.16 TF_CARD1.

## Polygon pours and split planes (outlines as drawn)
GND on Bottom Layer (solid): 38.14,203.28 153.96,203.54 154.22,54.18 38.14,54.7 38.1,203.24
GND on Top Layer (solid): 50.44,187.2 166.26,187.46 166.52,38.1 50.44,38.62 50.4,187.16

## Silkscreen, mask and mechanical layers (free items; w line width, h text height)
Top Overlay:
  text "G  R  T" at 134.034,152.253 h1.2 r90
  text "3V3          RXD / GND          TXD" at 108.496,133.702 h0.8 r90
  text "BOOT1 / BOOT0" at 69.282,88.35 h1.4 r90
  text "PG5(UART0MSG) / PG3(WTD) / PG8 / PG9" at 75.719,87.808 h1.4 r90
Bottom Overlay:
  text "Galaxy NUC980DK61 Dev Board 2.0(201907)" at 120.628,169.709 h1.5

## Text inside footprints (layer, text, board x,y; h text height)
SW1: Top Overlay "ON" at 73.343,81.362 h0.5; Top Overlay "1" at 74.613,76.782 h0.5 r180; Top Overlay "2" at 77.153,76.8 h0.5 r180; Top Overlay "3" at 79.693,76.8 h0.5 r180; Top Overlay "4" at 82.25,76.737 h0.5 r145
SW2: Top Overlay "ON" at 66.893,81.312 h0.5; Top Overlay "1" at 68.163,76.732 h0.5 r180; Top Overlay "2" at 70.703,76.75 h0.5 r180